# Altium PCB IPMC_MACP - 完成1.PcbDoc (part 1 of 2)
Units mil, origin at the board's own origin, x right, y up, seen from the top; angles counter-clockwise.
Board outline 3909.92 x 3909.91 mil, 2 copper layers (Top Layer, Bottom Layer); 134 components, 84 nets, 498 pads, 203 vias.
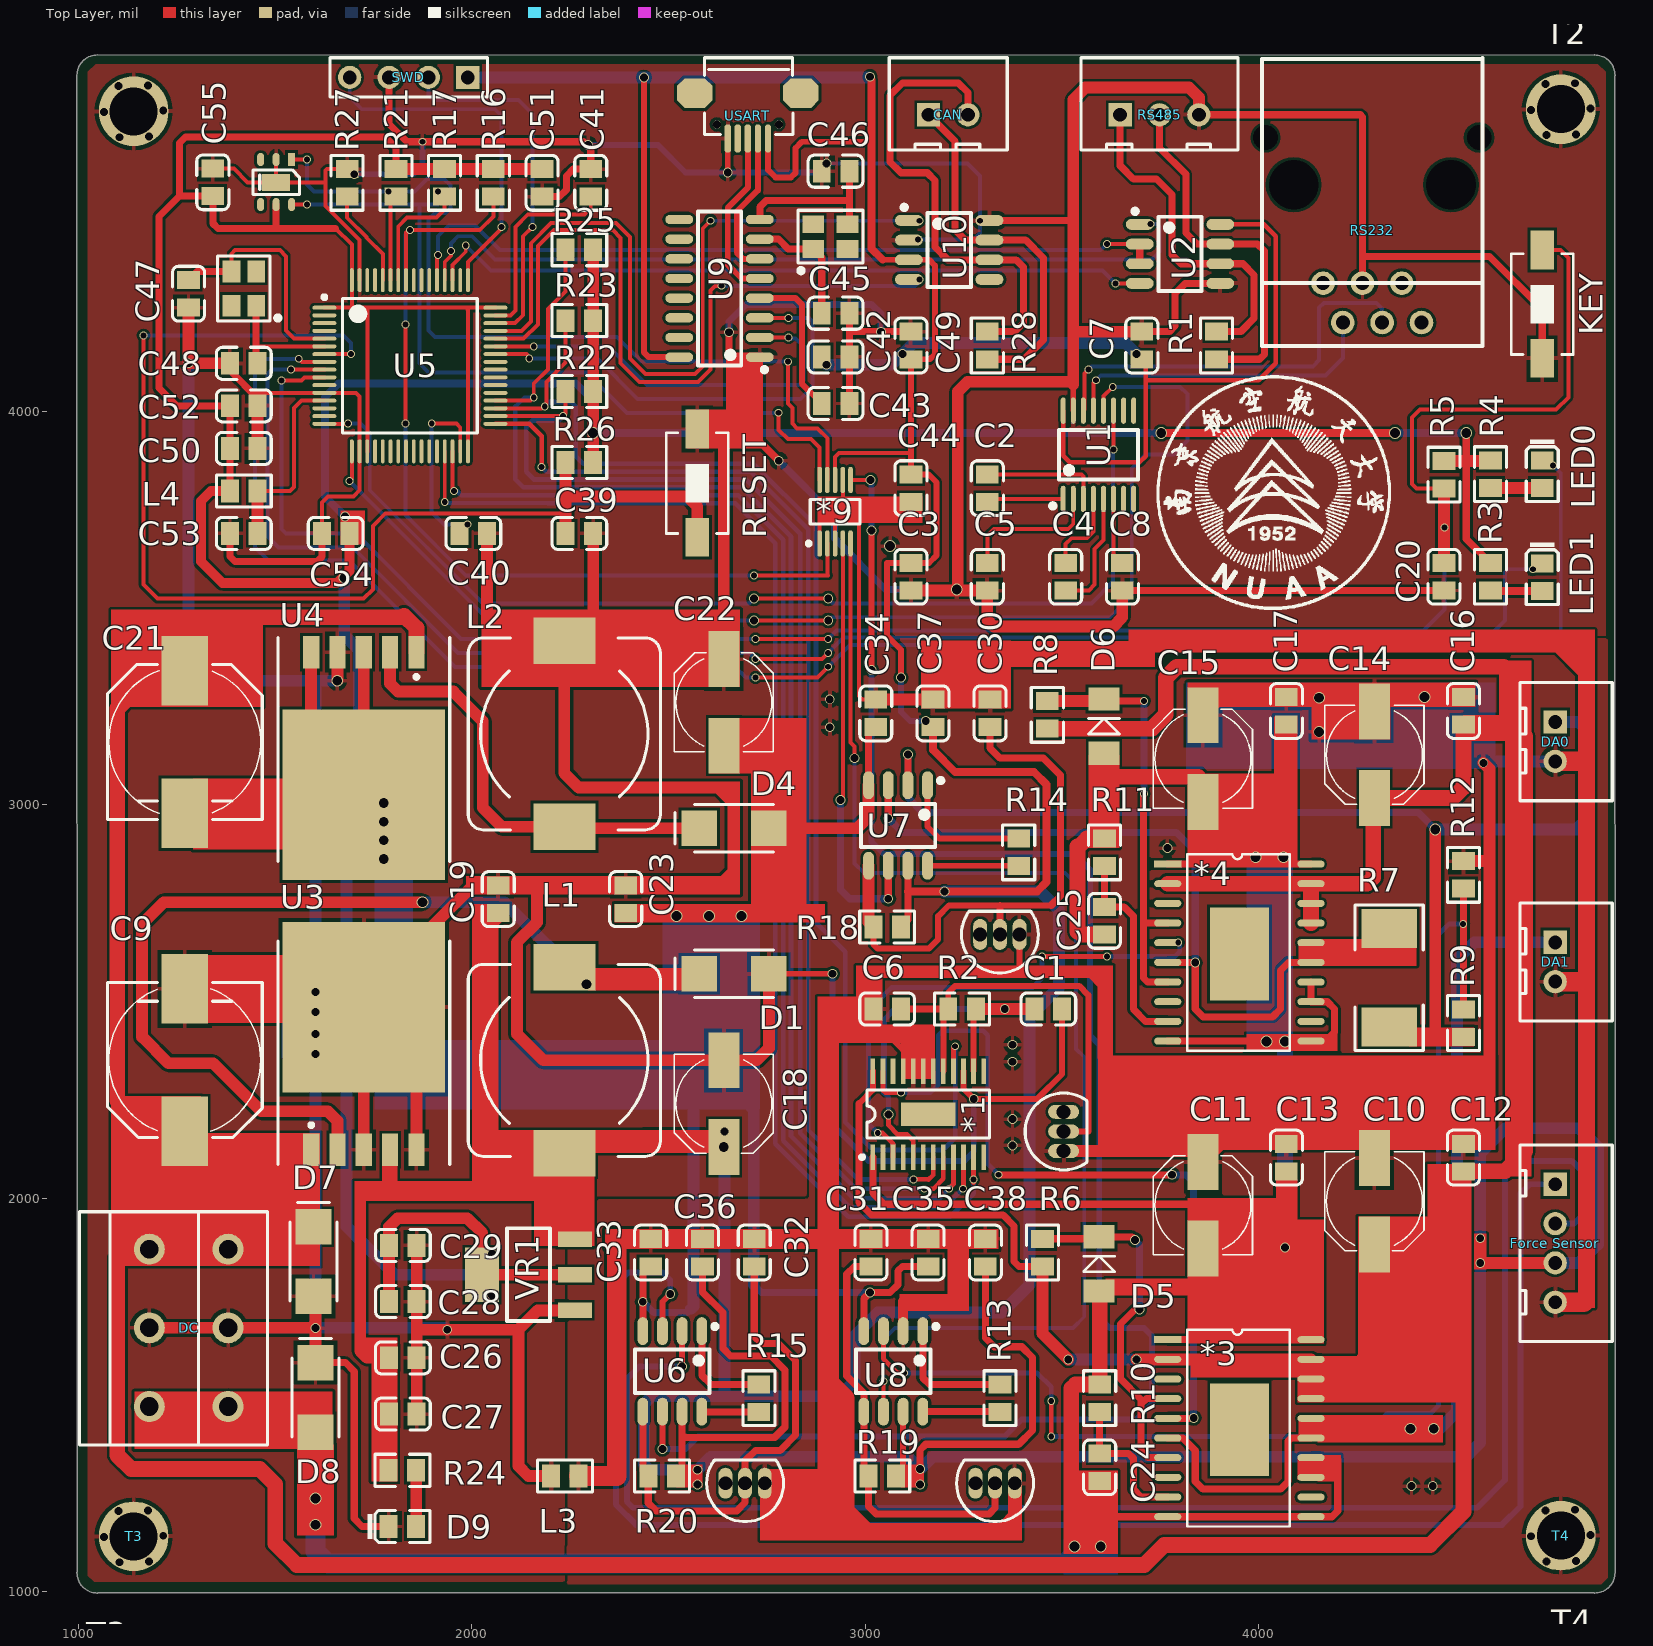
[diagram p0: Top Layer view]
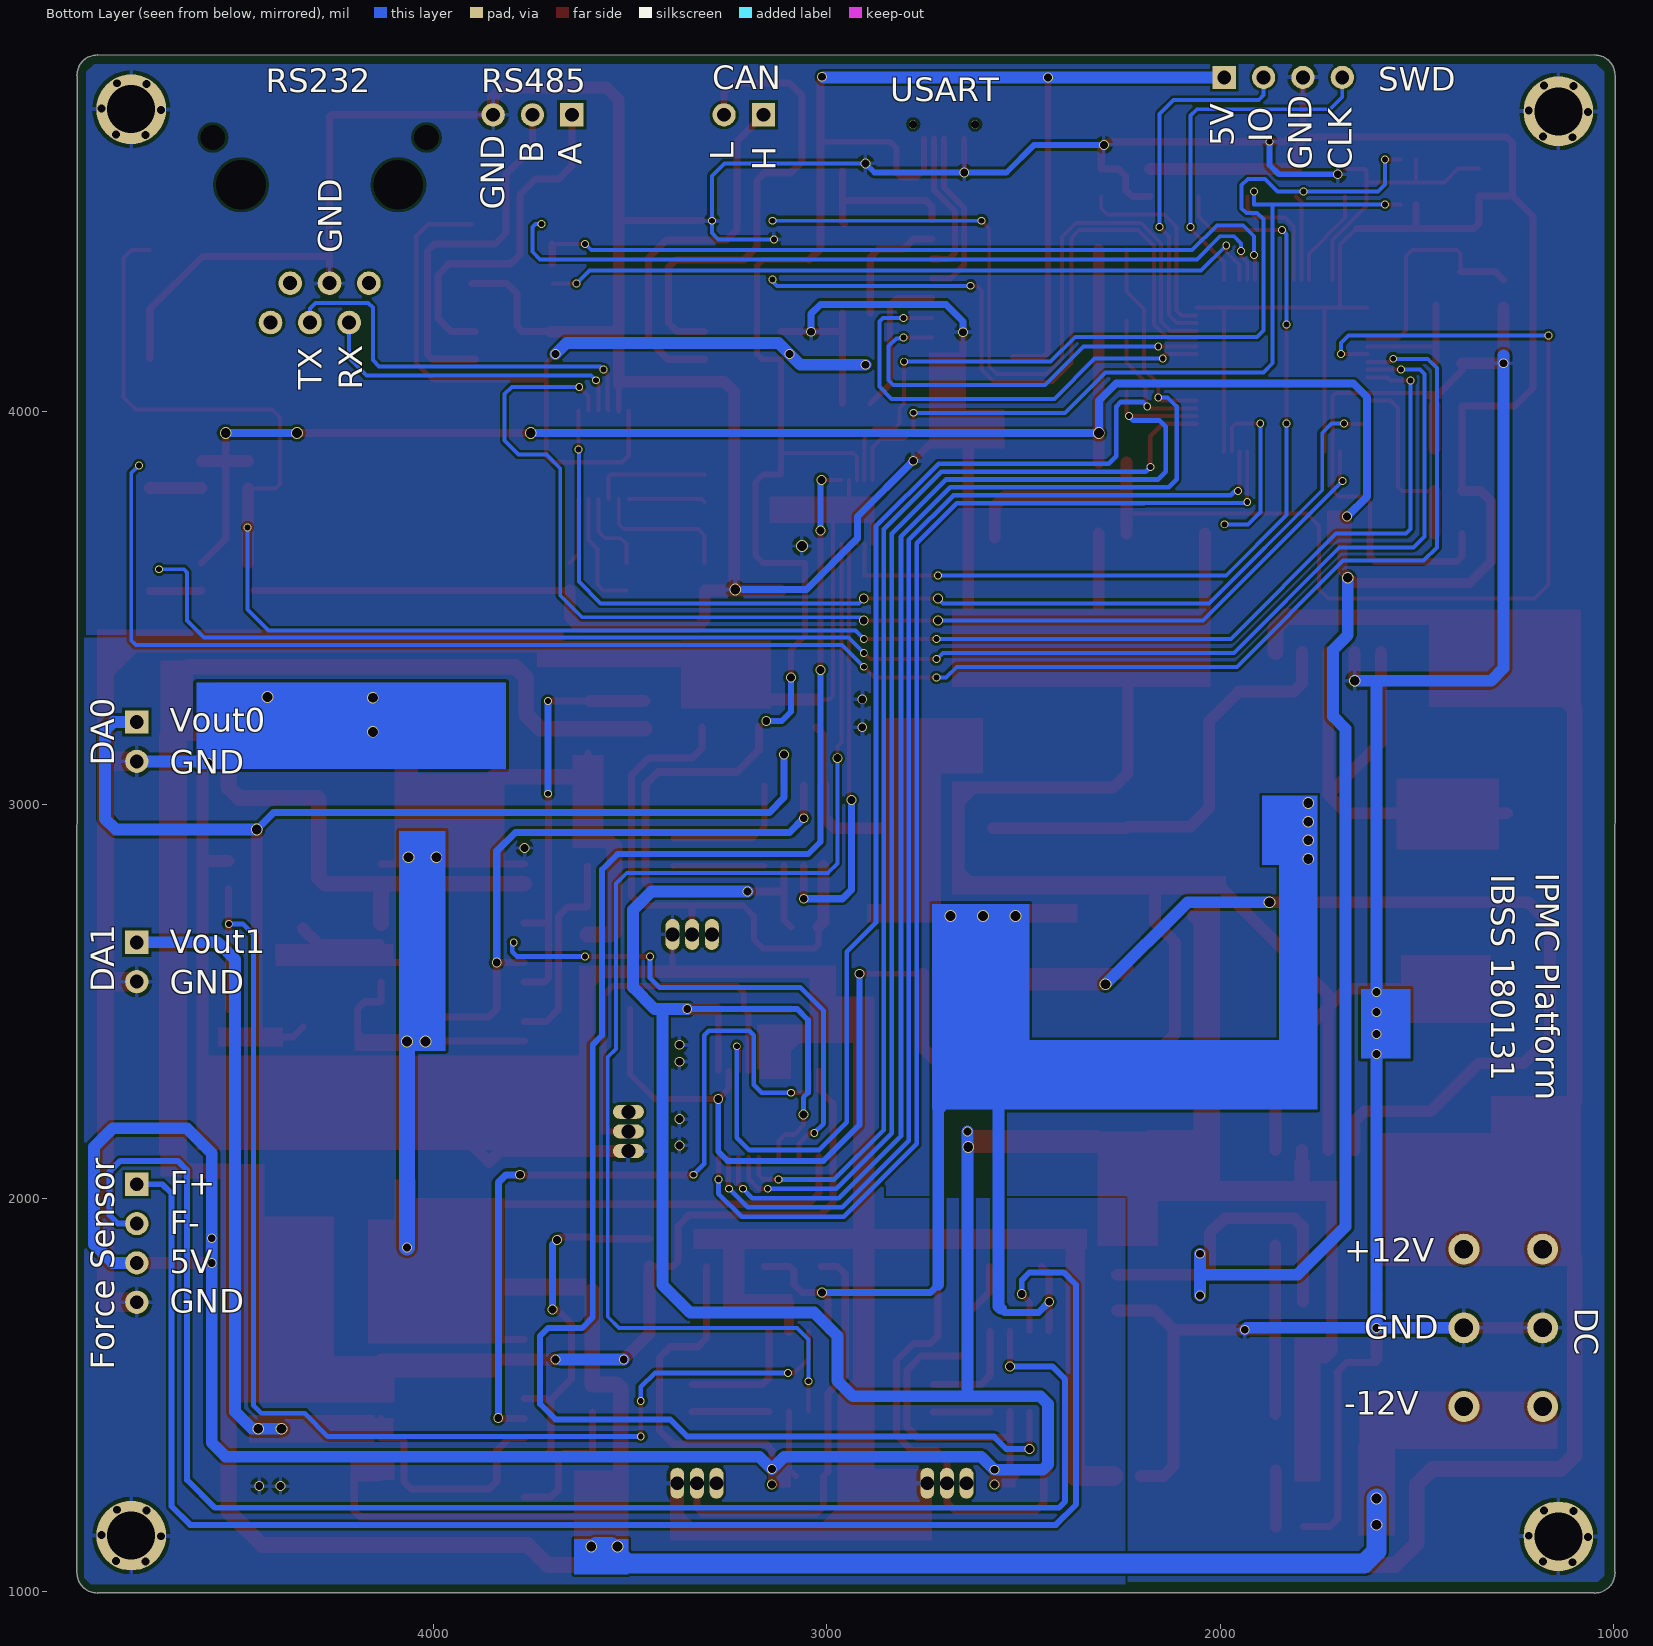
[diagram p1: Bottom Layer view, seen from below]
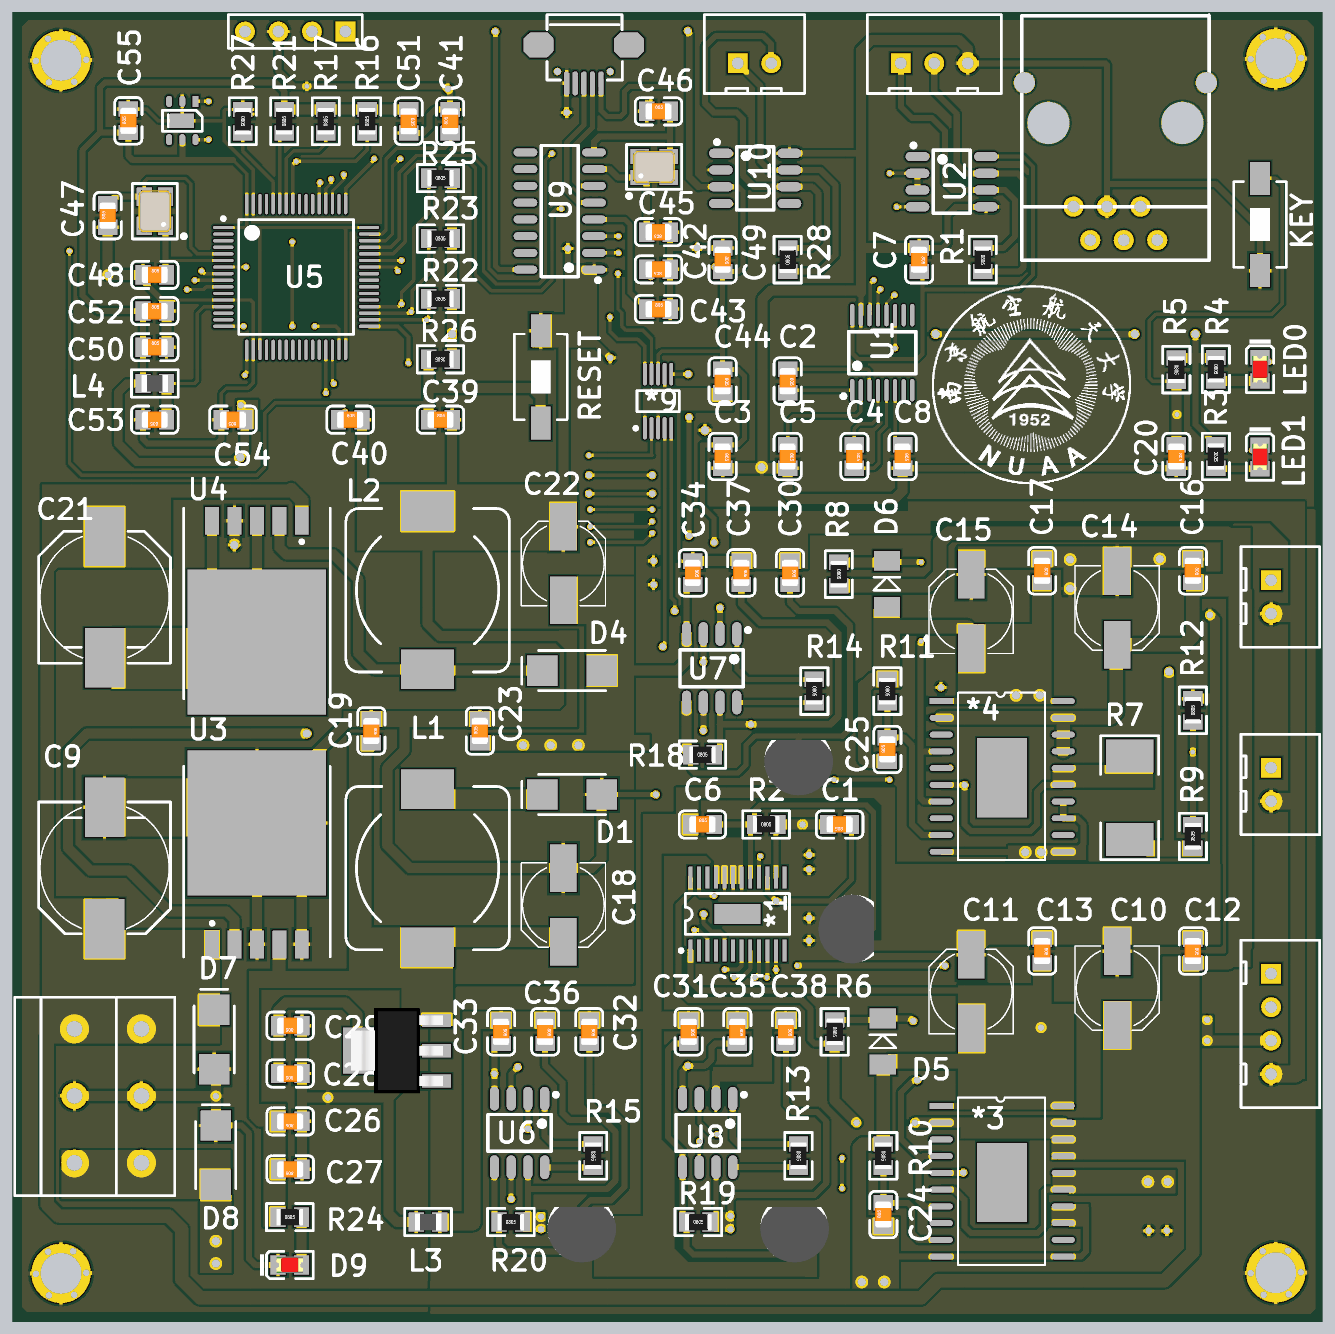
[diagram p3: 3D render of the assembled board from above, using the file's embedded part models]

## Layer stack, top to bottom
Top Solder: solder mask 0.4, Solder Resist, Dk 3.5
Top Layer: signal copper 1.4
Dielectric 1: dielectric 12.6, FR-4, Dk 4.8
Bottom Layer: signal copper 1.4
Bottom Solder: solder mask 0.4, Solder Resist, Dk 3.5

## Board outline
1040.51,996.32 ccw(c1042.13,1000) 1042.13,995.99 1043.65,995.99 ccw(c1047.64,1047.64) 1047.64,995.83 ccw(c1047.64,999.84) 1048.74,995.99 4852.84,995.98 ccw(c4853.94,999.84) 4853.94,995.83 ccw(c4853.94,1047.64) 4905.74,1047.45 ccw(c4901.73,1047.64) 4905.75,1047.64 ccw(c4901.73,1047.64) 4905.75,1047.64 4905.59,4852.84 ccw(c4901.73,4853.94) 4905.74,4853.94 ccw(c4853.94,4853.94) 4853.94,4905.74 ccw(c4853.94,4901.73) 4852.82,4905.59 1047.64,4905.74 ccw(c1047.64,4901.73) 1047.64,4905.74 ccw(c1047.64,4853.94) 995.83,4854.12 ccw(c999.84,4853.94) 995.83,4853.94 995.98,1048.74 ccw(c999.84,1047.64) 995.83,1047.64 ccw(c1047.64,1047.64)

## Design rules (kind name [scope] priority, off if disabled: settings)
Clearance [All] p1: gap=7
PolygonConnect [All] p1: connectstyle=Relief reliefconductorwidth=10 reliefentries=4 polygonreliefangle="90 Angle" airgapwidth=10
RoutingVias [All] p1: holewidth=28 width=50 viastyle="Through Hole" minholewidth=15 minwidth=15 maxholewidth=28 maxwidth=50
SolderMaskExpansion [All] p1: expansion=4
Width [All] p1: maxlimit=50 minlimit=8 preferedwidth=10
30 further rules are at their usual default settings.

## Classes and differential pairs
component class IPMC_MACP: *1 *3 *4 *9 C1 C2 C3 C4 C5 C6 C7 C8 C9 C10 C11 C12 C13 C14 C15 C16 C17 C18 C19 C20 C21 C22 C23 C24 C25 C26 C27 C28 C29 C30 C31 C32 C33 C34 C35 C36 C37 C38 C39 C40 C41 C42 C43 C44 C45 C46 C47 C48 C49 C50 C51 C52 C53 C54 C55 CAN D1 D4 D5 D6 D7 D8 D9 "Force Sensor" L1 L2 L3 L4 R1 R2 R3 R4 R5 R6 R7 R8 R9 R10 R11 R12 R13 R14 R15 R16 R17 R18 R19 R20 R21 R22 R23 R24 R25 R26 R27 R28 RESET RS232 RS485 SWD T2 T3 T4 U1 U2 U3 U4 U5 U6 U7 U8 U9 U10 USART VR1

## Components (designator, comment, footprint, x,y, rotation, side; value= is the part's Value field where it differs from the comment)
*1 "AD5722" TSSOP24P 3159.92,2213.2 r0 top
*2 "LM336" TO-92A 3504.08,2169.2 r0 top
*3 "OPA564AIDWP" HSOP20 3768.63,1639.91 r0 top
*4 "OPA564AIDWP" HSOP20 3768.63,2849 r0 top
*6 "LM336" TO-92A 3341.89,2670 r90 top
*7 "LM336" TO-92A 3329.76,1275 r90 top
*8 "LM336" TO-92A 2694.29,1275 r90 top
*9 "ADS1115" MSOP-UN10_N 2923.02,3744.57 r90 top
*10 "SHT20" DFN6 1463.5,4526.89 r90 top
C1 "100nF" 0805_C 3465.16,2480.51 r180 top
C2 "100nF" 0805_C 3310.04,3804.57 r270 top
C3 "100nF" 0805_C 3115.82,3579.37 r270 top
C4 "100nF" 0805_C 3509.25,3579.37 r270 top
C5 "100nF" 0805_C 3310.04,3579.37 r270 top
C6 "100nF" 0805_C 3055.39,2480.51 r0 top
C7 "100nF" 0805_C 3702.79,4167.17 r270 top
C8 "100nF" 0805_C 3653.23,3579.37 r270 top
C9 "470uF/35V" C-RB-S10 1270,2350.67 r90 top
C10 "47uF/35V" C-RB-S6 4294.03,1991.58 r90 top
C11 "47uF/35V" C-RB-S6 3858.13,1981.58 r270 top
C12 "100nF" 0805_C 4520.18,2102.82 r270 top
C13 "100nF" 0805_C 4070.18,2102.82 r270 top
C14 "47uF/35V" C-RB-S6 4294.03,3126.95 r90 top
C15 "47uF/35V" C-RB-S6 3858.13,3116.95 r270 top
C16 "100nF" 0805_C 4520.18,3238.2 r270 top
C17 "100nF" 0805_C 4070.18,3238.2 r270 top
C18 "220uF/16V" C-RB-S6 2640.12,2240 r90 top
C19 "100nF" 0805_C 2066.77,2759.84 r270 top
C20 "100nF" 0805_C 4470.71,3579.37 r270 top
C21 "470uF/35V" C-RB-S10 1270,3159.33 r270 top
C22 "220uF/16V" C-RB-S6 2640.12,3260 r270 top
C23 "100nF" 0805_C 2390.79,2759.84 r90 top
C24 "1nF" 0805_C 3595.69,1315.57 r90 top
C25 "1nF" 0805_C 3607.81,2704.67 r90 top
C26 "10uF" 0805_C 1824.35,1593.75 r180 top
C27 "100nF" 0805_C 1824.35,1450.84 r180 top
C28 "10uF" 0805_C 1824.35,1736.67 r180 top
C29 "100nF" 0805_C 1824.35,1879.59 r180 top
C30 "100nF" 0805_C 3317.13,3231.95 r270 top
C31 "100nF" 0805_C 3014.32,1861.34 r270 top
C32 "100nF" 0805_C 2717.54,1861.34 r270 top
C33 "100nF" 0805_C 2454.29,1861.34 r270 top
C34 "100nF" 0805_C 3026.45,3231.95 r270 top
C35 "100nF" 0805_C 3159.66,1861.34 r270 top
C36 "100nF" 0805_C 2585.92,1861.34 r270 top
C37 "100nF" 0805_C 3171.79,3231.95 r270 top
C38 "100nF" 0805_C 3305,1861.34 r270 top
C39 "100nF" 0805_C 2273.03,3689.37 r0 top
C40 "2.2uF" 0805_C 2003.54,3689.37 r0 top
C41 "2.2uF" 0805_C 2301.97,4580.63 r90 top
C42 "100nF" 0805_C 2924.2,4138.23 r180 top
C43 "100nF" 0805_C 2924.2,4019.68 r0 top
C44 "100nF" 0805_C 3115.82,3804.57 r270 top
C45 "22pF" 0805_C 2924.2,4249.28 r180 top
C46 "22pF" 0805_C 2924.2,4610.24 r0 top
C47 "22pF" 0805_C 1279.37,4298.83 r90 top
C48 "22pF" 0805_C 1420,4121.89 r0 top
C49 "100nF" 0805_C 3115.82,4167.17 r270 top
C50 "100nF" 0805_C 1420,3905.63 r0 top
C51 "100nF" 0805_C 2178.13,4580.63 r270 top
C52 "100nF" 0805_C 1420,4013.76 r0 top
C53 "100nF" 0805_C 1420,3689.37 r180 top
C54 "100nF" 0805_C 1653.54,3689.37 r180 top
C55 "100nF" 0805_C 1341.18,4581.89 r90 top
CAN "Header 2" HDR2X1_B1 3160.79,4753.64 r0 top (schematic designator CAN1)
D1 "1N5824" DIODE-SMA 2754.69,2570 r180 top
D4 "1N5824" DIODE-SMA 2754.69,2940 r180 top
D5 "1N4732" DIODE-1206 3594.37,1763.64 r90 top
D6 "1N4732" DIODE-1206 3606.5,3130.5 r90 top
D7 "1N4001" DIODE-SMA 1597.2,1749.88 r90 top
D8 "1N4001" DIODE-SMA 1602.2,1404.53 r90 top
D9 "红灯 0805" 0805_LED_S1 1823.15,1165 r0 top
DA0 "Header 2" HDR2X1_B1 4753.64,3210 r270 top (schematic designator DA1)
DA1 "Header 2" HDR2X1_B1 4753.64,2650 r270 top (schematic designator DA2)
DC "KF301-3P" KF301-3P 1180,1470 r90 top (schematic designator *5)
"Force Sensor" "Header 4" HDR4X1_B1 4753.64,2035 r270 top (schematic designator "Force Sensor1")
KEY "SW-PB" SW_PB2_A1 4720.71,4270 r0 top (schematic designator S1)
L1 "33uH" L-SMD-12 2234.69,2350 r270 top
L2 "33uH" L-SMD-12 2234.69,3180 r90 top
L3 "10uH/磁珠" 0805_L 2236.22,1293.31 r0 top
L4 "10uH" 0805_L 1420,3797.5 r180 top
LED0 "红灯 0805" 0805_LED_S1 4720.71,3840 r270 top (schematic designator D3)
LED1 "翠绿 0805" 0805_LED_S1 4720.71,3578.13 r270 top (schematic designator D2)
R1 "120Ω" 0805_R 3892.52,4167.17 r270 top
R2 "2.4KΩ" 0805_R 3245.74,2480.51 r0 top
R3 "1KΩ" 0805_R 4588.82,3579.37 r270 top
R4 "1KΩ" 0805_R 4588.82,3840 r270 top
R5 "10KΩ" 0805_R 4470.71,3838.82 r270 top
R6 "10KΩ" 0805_R 3450.34,1861.34 r270 top
R7 "10mR" 2512 4331.43,2559.98 r270 top
R8 "10KΩ" 0805_R 3462.47,3228.2 r270 top
R9 "10KΩ" 0805_R 4520.18,2444.67 r90 top
R10 "10KΩ" 0805_R 3595.69,1491.14 r270 top
R11 "10KΩ" 0805_R 3607.81,2878.78 r270 top
R12 "1KΩ" 0805_R 4520.18,2821.43 r90 top
R13 "0Ω" 0805_R 3342.31,1491.14 r270 top
R14 "200Ω" 0805_R 3389.87,2878.78 r270 top
R15 "1KΩ" 0805_R 2729.29,1491.14 r270 top
R16 "4.7KΩ" 0805_R 2054.28,4580.63 r90 top
R17 "4.7KΩ" 0805_R 1930.44,4580.63 r90 top
R18 "2.4KΩ" 0805_R 3055.39,2689 r0 top
R19 "2.4KΩ" 0805_R 3043.26,1293.31 r0 top
R20 "2.4KΩ" 0805_R 2483.23,1293.31 r0 top
R21 "4.7KΩ" 0805_R 1806.6,4580.63 r90 top
R22 "4.7KΩ" 0805_R 2273.03,4050 r0 top
R23 "4.7KΩ" 0805_R 2273.03,4230.31 r0 top
R24 "1KΩ" 0805_R 1823.15,1307.92 r0 top
R25 "4.7KΩ" 0805_R 2273.03,4410.63 r0 top
R26 "10KΩ" 0805_R 2273.03,3869.68 r180 top
R27 "10KΩ" 0805_R 1682.76,4580.63 r270 top
R28 "120Ω" 0805_R 3310.04,4167.17 r90 top
RESET "SW-PB" SW_PB2_A1 2572.52,3819.37 r180 top (schematic designator RESET1)
RS232 "RJ11" RJ6-RJ11 4288.67,4325.57 r270 top (schematic designator RS1)
RS485 "Header 3" HDR3X1_B1 3647.75,4753.64 r0 top (schematic designator RS2)
SWD "Header 4" HDR1X4 1989.25,4848.64 r180 top (schematic designator SWD1)
T1 "M3铜柱螺丝孔" 螺丝孔-3MM 1140,4762.52 r0 top
T2 "M3铜柱螺丝孔" 螺丝孔-3MM 4767.72,4767.72 r0 top
T3 "M3铜柱螺丝孔" 螺丝孔-3MM 1140,1140 r0 top
T4 "M3铜柱螺丝孔" 螺丝孔-3MM 4767.72,1141.73 r0 top
U1 "SP3232EEY-L/TR" TSSOP-16 3592.52,3889.37 r0 top
U2 "SP3485EN-L/TR" SOIC-8_150MIL 3799.9,4400 r270 top
U3 "LM2596S-5.0" TO-263-5 1725,2288.66 r0 top
U4 "LM2596S-5.0" TO-263-5 1725,3221.34 r180 top
U5 "STM32F405RGT6" STM-LQFP64_L 1842.2,4115.63 r0 top
U6 "AD620ARZ-REEL" SOIC-8_150MIL 2509.29,1559.32 r180 top
U7 "AD620ARZ-REEL" SOIC-8_150MIL 3083.14,2946.95 r180 top
U8 "AD620ARZ-REEL" SOIC-8_150MIL 3071.02,1559.32 r180 top
U9 "CH340G" SOIC-16_150MIL 2629.31,4312.44 r90 top
U10 "CAN/TJA1050T/CM" SOIC-8_150MIL 3212.93,4410 r270 top
USART "USB_M" USB_MICRO 2801.26,4758.64 r180 top (schematic designator USB_USART1)
VR1 "AMS1117-3.3" ? 2143.78,1805 r0 top
Y1 "12MHZ" SMD-3225_4P 2911.14,4444.07 r0 top
Y2 "25MHZ" SMD-3225_4P 1420,4311.89 r90 top
? "Comment" NUAA-15mm 3740.16,3496.06 r0 top

## Footprints (in the part's own frame and the unit in brackets; to place one, negate y for a bottom-side part, rotate by r counter-clockwise, add the part's x,y. Pads: shape width x height; smd on the part's side, far side on the other; paste and mask are expansions set on the pad)
0805_C [mm]
  rect 1.16x1.47 smd: 1(-0.89,0) 2(0.89,0)
  silkscreen extent -1.77,-1.04 1.77,1.04, body extent -1,-0.62 1,0.63, height 0.77
0805_L [mm]
  rect 1.16x1.47 smd: 1(-0.89,0) 2(0.89,0)
  silkscreen extent -1.77,-1.04 1.77,1.03, body extent -1.02,-0.64 1.03,0.64, height 0.6
0805_LED_S1 [mm]
  rect 1.16x1.47 smd: A(0.89,0) K(-0.89,0)
  silkscreen extent -2.24,-1.04 1.77,1.03, body extent -1.01,-0.62 1.01,0.62, height 1.1
0805_R [mm]
  rect 1.16x1.47 smd: 1(-0.89,0) 2(0.89,0)
  silkscreen extent -1.77,-1.04 1.77,1.03, body extent -1,-0.62 1,0.63, height 0.49
2512 [mm]
  rect 2.5x3.6 smd: 1(-3.175,0) 2(3.175,0)
  silkscreen extent -4.7,-2.2 4.7,2.2, body extent -3.18,-1.65 3.18,1.65, height 1.2
C-RB-S6 [mm] "贴片电解"
  rect 3.6x2 smd: 1(-2.794,0) 2(2.794,0)
  silkscreen extent -3.2,-3.2 3.2,3.2, body extent -3.15,-3.12 3.15,3.17, height 7.7
C-RB-S10 [mm] "贴片电解"
  rect 4.5x3 smd: 1(-4.6,0) 2(4.6,0)
  silkscreen extent -5,-5 5,5, body extent -4.97,-4.92 5.03,5.08, height 10
DFN6 [mm]
  rect 0.85x0.45 smd: 1(2.87,-1.981)
  rect 1.1x1.8 smd: 2(1.397,-0.965)
  oval 0.85x0.45 smd: 2(2.87,-0.981) 3(2.87,0.019) 4(-0.03,0.019) 5(-0.03,-0.981) 6(-0.03,-1.981)
  silkscreen extent 0.61,-2.48 2.2,0.52, body extent 0.19,-2.46 2.63,0.55, height 1
DIODE-1206 [mm] "玻璃封装二极管"
  rect 1.5x2 smd: 1(0,0) 2(3.5,0)
  silkscreen extent 1.25,-1 2.25,1
DIODE-SMA [mm] "贴片二极管"
  rect 2.3x2.3 smd: 1(0,0) 2(4.5,0)
  silkscreen extent -0.29,-1.52 6.06,1.52, body extent -0.67,-1.4 5.17,1.4, height 3
HDR1X4 [mm] "Connector; Header; 4 Position"
  rect 1.5x1.5 hole 0.9: 1(0,0)
  round 1.5 hole 0.9: 2(2.54,0) 3(5.08,0) 4(7.62,0)
  silkscreen extent -1.27,-1.27 8.89,1.27
HDR2X1_B1 [mm] "Connector; Header; 4 Position"
  rect 1.5x1.5 hole 0.9: 1(0,0)
  round 1.5 hole 0.9: 2(2.54,0)
  silkscreen extent -2.54,-2.29 5.08,3.68, body extent -2.41,-2.16 5.08,3.56, height 1.5
HDR3X1_B1 [mm] "Connector; Header; 3 Position"
  rect 1.5x1.5 hole 0.9: 1(0,0)
  round 1.5 hole 0.9: 2(2.54,0) 3(5.08,0)
  silkscreen extent -2.54,-2.29 7.62,3.68, body extent -2.54,-2.29 7.62,3.68, height 1.5
HDR4X1_B1 [mm] "Connector; Header; 4 Position"
  rect 1.5x1.5 hole 0.9: 1(0,0)
  round 1.5 hole 0.9: 2(2.54,0) 3(5.08,0) 4(7.62,0)
  silkscreen extent -2.54,-2.29 10.16,3.68, body extent -2.41,-2.16 10.03,3.56, height 1.5
HSOP20 [mm]
  rect 1.75x0.45 smd: 1(0,0)
  oval 1.75x0.45 smd: 2(0,-1.27) 3(0,-2.54) 4(0,-3.81) 5(0,-5.08) 6(0,-6.35) 7(0,-7.62) 8(0,-8.89) 9(0,-10.16) 10(0,-11.43) 11(9.254,-11.43) 12(9.254,-10.16) 13(9.254,-8.89) 14(9.254,-7.62) 15(9.254,-6.35) 16(9.254,-5.08) 17(9.254,-3.81) 18(9.254,-2.54) 19(9.254,-1.27) 20(9.254,0)
  rect 3.8x6 smd: ""(4.623,-5.817)
  silkscreen extent 1.27,-12.06 7.87,0.64, body extent 1.27,-12.06 7.87,0.64, height 0.25
KF301-3P [mm] "蓝色端子"
  round 2 hole 1.2: 1(0,0) 1(0,-5.08) 2(5.08,-5.08) 2(5.08,0) 3(10.16,-5.08) 3(10.16,0)
  silkscreen extent -2.49,-7.62 12.57,4.52
L-SMD-12 [mm] "贴片电感12*12"
  rect 3x4 smd: 1(-6,0) 2(6,0)
  silkscreen extent -6.2,-6.2 6.2,6.2, body extent -6.21,-6.23 6.21,6.18, height 2.5
MSOP-UN10_N [mm] "TSSOP"
  oval 1.7x0.3 smd: 1(-2.05,1) 2(-2.05,0.5) 3(-2.05,0) 4(-2.05,-0.5) 5(-2.05,-1) 6(2.05,-1) 7(2.05,-0.5) 8(2.05,0) 9(2.05,0.5) 10(2.05,1)
  silkscreen extent -2.17,-1.6 0.8,1.82, body extent -1.6,-1.6 1.6,1.6, height 1.1
NUAA-15mm [mil] "南航"
  silkscreen extent 1,1 595,595
RJ6-RJ11 [mil]
  round 60 hole 35.43: 1(100,125) 2(0,75) 3(100,25) 4(0,-25) 5(100,-75) 6(0,-125)
  round 60 hole 125.98: 7(-250,200) 8(-250,-200)
  round 60 hole 62.99: 9(-370,271.65) 10(-370,-271.65)
  silkscreen extent -572,-280 160,280, body extent -570,-280 160,280, height 512
SMD-3225_4P [mm]
  rect 1.4x1.15 smd: 1(-1.1,-0.8) 2(1.1,-0.8) 3(1.1,0.8) 4(-1.1,0.8)
  silkscreen extent -2.1,-2.35 2.1,1.7, body extent -1.6,-1.25 1.6,1.25, height 0.61
SOIC-8_150MIL [mm]
  oval 0.7x1.8 smd: 1(-1.905,-2.6) 2(-0.635,-2.6) 3(0.635,-2.6) 4(1.905,-2.6) 5(1.905,2.6) 6(0.635,2.6) 7(-0.635,2.6) 8(-1.905,2.6)
  silkscreen extent -2.9,-3.05 2.4,1.4
SOIC-16_150MIL [mm]
  oval 0.6x1.8 smd: 1(-4.445,-2.6) 2(-3.175,-2.6) 3(-1.905,-2.6) 4(-0.635,-2.6) 5(0.635,-2.6) 6(1.905,-2.6) 7(3.175,-2.6) 8(4.445,-2.6) 9(4.445,2.6) 10(3.175,2.6) 11(1.905,2.6) 12(0.635,2.6) 13(-0.635,2.6) 14(-1.905,2.6) 15(-3.175,2.6) 16(-4.445,2.6)
  silkscreen extent -5.4,-3.05 4.97,1.4
STM-LQFP64_L [mm] "Thin QFP, 64-Leads, Body 10x10mm, Pitch 0.5mm, IPC High Density"
  oval 1.55x0.25 smd: 1(-5.525,3.75) 2(-5.525,3.25) 3(-5.525,2.75) 4(-5.525,2.25) 5(-5.525,1.75) 6(-5.525,1.25) 7(-5.525,0.75) 8(-5.525,0.25) 9(-5.525,-0.25) 10(-5.525,-0.75) 11(-5.525,-1.25) 12(-5.525,-1.75) 13(-5.525,-2.25) 14(-5.525,-2.75) 15(-5.525,-3.25) 16(-5.525,-3.75) 33(5.525,-3.75) 34(5.525,-3.25) 35(5.525,-2.75) 36(5.525,-2.25) 37(5.525,-1.75) 38(5.525,-1.25) 39(5.525,-0.75) 40(5.525,-0.25) 41(5.525,0.25) 42(5.525,0.75) 43(5.525,1.25) 44(5.525,1.75) 45(5.525,2.25) 46(5.525,2.75) 47(5.525,3.25) 48(5.525,3.75)
  oval 0.25x1.55 smd: 17(-3.75,-5.525) 18(-3.25,-5.525) 19(-2.75,-5.525) 20(-2.25,-5.525) 21(-1.75,-5.525) 22(-1.25,-5.525) 23(-0.75,-5.525) 24(-0.25,-5.525) 25(0.25,-5.525) 26(0.75,-5.525) 27(1.25,-5.525) 28(1.75,-5.525) 29(2.25,-5.525) 30(2.75,-5.525) 31(3.25,-5.525) 32(3.75,-5.525) 49(3.75,5.525) 50(3.25,5.525) 51(2.75,5.525) 52(2.25,5.525) 53(1.75,5.525) 54(1.25,5.525) 55(0.75,5.525) 56(0.25,5.525) 57(-0.25,5.525) 58(-0.75,5.525) 59(-1.25,5.525) 60(-1.75,5.525) 61(-2.25,5.525) 62(-2.75,5.525) 63(-3.25,5.525) 64(-3.75,5.525)
  silkscreen extent -5.65,-4.35 4.35,4.55, body extent -5,-5 5,5, height 1.6
SW_PB2_A1 [mm]
  rect 1.5x2.5 smd: 1(0,3.556) 2(0,-3.444)
  silkscreen extent -2,-3.19 2,3.31, body extent -2.03,-3.17 2.03,3.3, height 1.2
TO-92A [mm]
  oval 2x0.9 hole 0.9: 1(0,-1.27) 2(0,0) 3(0,1.27)
  silkscreen extent -2.48,-2.48 1.5,2.48, body extent -2.6,-2.64 1.6,2.59, height 8
TO-263-5 [mm] "贴片LM2596"
  rect 1.05x2.1 smd: 1(-3.4,-4.225) 2(-1.7,-4.225) 3(0,-4.225) 4(1.7,-4.225) 5(3.4,-4.225)
  rect 10.5x11 smd: 6(0,4.987)
  silkscreen extent -5.55,-5.18 5.55,9.28, body extent -5.33,-4.7 5.33,10.29, height 3
TSSOP24P [mm] "Shrink Small Outline; 24 Leads; Body Width 4.4 mm; Pitch 0.65 mm"
  rect 0.3x1.65 smd: 1(-3.575,-2.775) 2(-2.925,-2.775) 3(-2.275,-2.775) 4(-1.625,-2.775) 5(-0.975,-2.775) 6(-0.325,-2.775) 7(0.325,-2.775) 8(0.975,-2.775) 9(1.625,-2.775) 10(2.275,-2.775) 11(2.925,-2.775) 12(3.575,-2.775) 13(3.575,2.775) 14(2.925,2.775) 15(2.275,2.775) 16(1.625,2.775) 17(0.975,2.775) 18(0.325,2.775) 19(-0.325,2.775) 20(-0.975,2.775) 21(-1.625,2.775) 22(-2.275,2.775) 23(-2.925,2.775) 24(-3.575,2.775)
  rect 3.5x1.5 smd: 25(0,0)
  silkscreen extent -4.4,-2.9 3.95,1.55
TSSOP-16 [mm]
  oval 0.32x1.7 smd: 1(-2.275,-2.85) 2(-1.625,-2.85) 3(-0.975,-2.85) 4(-0.325,-2.85) 5(0.325,-2.85) 6(0.975,-2.85) 7(1.625,-2.85) 8(2.275,-2.85) 9(2.275,2.85) 10(1.625,2.85) 11(0.975,2.85) 12(0.325,2.85) 13(-0.325,2.85) 14(-0.975,2.85) 15(-1.625,2.85) 16(-2.275,2.85)
  silkscreen extent -3.1,-3.45 2.55,1.6
USB_MICRO [mm] "USB方孔"
  oct 0.4x1.8 smd: 1(1.24,1.651) 2(1.89,1.651) 3(2.54,1.651) 4(3.19,1.651) 5(3.84,1.651)
  oct 2.286x1.9 smd: 6(5.969,-1.27) 7(-0.889,-1.27)
  round 0.54 hole 0.54: ""(0.54,0.753) ""(4.54,0.753)
  silkscreen extent -0.38,-3.56 5.33,1.4, body extent -0.43,-3.61 5.38,1.47, height 1.85
螺丝孔-3MM [mm]
  round 4.5 hole 3.1: 1(0,0)
? [mm]
  rect 2.2x1 smd: 1(3,-2.3) 2(3,0) 3(3,2.3)
  rect 2.2x3.5 smd: 2(-3,0)
  silkscreen extent -1.4,-3 1.4,3, body extent -3.49,-3.24 3.49,3.24, height 1.64

## Part data
*1: "双极性DAC"
*2 *6 *7 *8: "基准电压芯片2.5/5V"
*3 *4: "PAD on Bottom"
C1 C2 C3 C4 C5 C6 C7 C8 C12 C13 C16 C17 C19 C20 C23 C27 C29 C30 C31 C32 C33 C34 C35 C36 C37 C38 C39 C42 C43 C44 C49 C50 C51 C52 C53 C54 C55: library part "0805 100nF(104) 10% 50V", "贴片电容"
C9 C10 C11 C14 C15 C18 C21 C22: library part "Cap Pol", "极性电解电容"
C24 C25: library part "0805 1nF (102) 10% 50V", "贴片电容"
C26 C28: library part "0805 10uF (106) 10% 25V", "贴片电容"
C40 C41: library part "0805 2.2uF (225) 20% 50V", "贴片电容"
C45 C46 C47 C48: library part "0805 22pF (220) 5% 50V", "贴片电容"
CAN DA0 DA1 RS485: "接插件"
D1 D4 D7 D8: library part Diode, "二极管"
D5 D6: library part Diode-Z, "稳压二极管"
D9 LED0: library part "0805 红灯", "发光二极管"
DC: "蓝色端子"
"Force Sensor" SWD: "Header, 4-Pin"
KEY RESET: "微动开关"
L1 L2: library part Inductor, "电感"
L3 L4: library part "0805 10uH 10%", "贴片电感"
LED1: library part "0805 翠绿", "发光二极管"
R1 R28: library part "0805 120Ω (1200) 1%", "贴片电阻"
R2 R18 R19 R20: library part "0805 2.4KΩ (2401) 1%", "贴片电阻"
R3 R4 R15 R24: library part "0805 1KΩ (1001) 1%", "贴片电阻"
R5 R6 R8 R10 R11 R26 R27: library part "0805 10KΩ (1002) 1%", "贴片电阻"
R7: library part Res1, "贴片电阻"
R9 R12: library part "0805 20KΩ (2002) 1%", "贴片电阻"
R13: library part "0805 0Ω (0R0) 1%", "贴片电阻"
R14: library part "0805 200Ω (2000) 1%", "贴片电阻"
R16 R17 R21 R22 R23 R25: library part "0805 4.7KΩ (4701) 1%", "贴片电阻"
U1: "RS232"
U2: "RS-485/RS-422"
U3 U4: "5V稳压芯片"
U5: "ARM Cortex-M4 32-bit MCU+FPU, 210 DMIPS, 1024 kB Flash, 192 kB Internal RAM, 51 I/Os, 64-pin LQFP, -40 to 85 degC, Tray"
U6 U7 U8: "仪放"
U9: "USB"
U10: "CAN"
USART: "MicroUSB接口"
VR1: library part "SOT-223 AMS1117-3.3", "低压差线性稳压(LDO)"
Y1: library part "SMD-3225_4P  12MHZ 20PF 10PPM", "贴片晶振"
Y2: library part "SMD-3225_4P  25MHZ 12PF 10PPM", "贴片晶振"

## Via types
v1: diameter 20, hole 15, Top Layer to Bottom Layer, 76 vias
v2: diameter 25, hole 20, Top Layer to Bottom Layer, 71 vias
v3: diameter 30, hole 25, Top Layer to Bottom Layer, 32 vias
v4: diameter 20, hole 20, Top Layer to Bottom Layer, 24 vias

## Nets (pads, with @x,y where several pads share a name; then routed paths per layer and width w, separated by ;. In a path a pad name is that pad's centre, name@x,y a point inside that pad or via, vN(x,y) a via of type N, cw(c..) or ccw(c..) an arc to the next point about the centre after c; other vN are vias at no path point)
2.5V: *1.17 *2.2 C6.2 R2.1 | length 1107.3
  Top Layer w15: *1.17@3198.3,2322.45 3198.3,2468.11 R2.1@3210.7,2480.51 3210.7,2521.73 3228.35,2539.37 3543.31,2539.37 3566.84,2515.84 3566.84,2169.2 *2.2@3504.08,2169.2
  Top Layer w18: C6.2@3090.43,2480.51 R2.1@3210.7,2480.51
3.3V: *10.5 C28.2 C29.2 C50.1 C51.1 C52.1 C54.1 C55.1 L4.2 R3.1 R4.1 R5.1 R16.2 R17.2 R21.2 R22.2 R23.2 R25.2 R26.1 U5.1 U5.19 U5.32 U5.48 U5.64 VR1.2 | length 12075.7
  Top Layer w10: U5.1@1624.68,4263.27 1692.91,4263.27 ; 1653.54,4464.57 1694.57,4423.54 U5.64@1694.57,4333.15 1694.57,4264.92 1692.91,4263.27 ; U5.19@1733.94,3898.11 1733.94,4260.98 1736.22,4263.27 ; U5.32@1989.84,3898.11 1989.84,4257.68 1984.25,4263.27 ; U5.48@2059.72,4263.27 1984.25,4263.27 ; R4.1@4587.64,3873.86 R4.1@4588.82,3875.04 ; 1692.91,4263.27 1736.22,4263.27 ; 1736.22,4263.27 1984.25,4263.27
  Top Layer w18: L4.2@1384.96,3797.5 C50.1@1384.96,3905.63 C52.1@1384.96,4013.76 1250.02,4013.76 1204.72,4059.06 1204.72,4495.28 1256.3,4546.85 ; *10.5@1502.13,4525.72 1502.13,4466.69 1500,4464.57 ; 1653.54,4464.57 1500,4464.57 ; R21.2@1806.6,4615.67 1806.6,4669.78 1779.53,4696.85 1271.65,4696.85 1256.3,4681.5 1256.3,4546.85 ; v3(4527.56,3944.88) 4527.56,3873.86 4527.56,3675.67 R3.1@4588.82,3614.41 ; 1256.3,4546.85 C55.1@1341.18,4546.85 1341.18,4477.72 1354.33,4464.57 1500,4464.57
  Top Layer w20: v3(3751.97,3944.88) v3(4346.46,3944.88)
  Top Layer w25: L4.2@1384.96,3797.5 1336.87,3797.5 1311.02,3771.65 1311.02,3618.11 1366.14,3562.99 1657.48,3562.99 1688.58,3594.09 C54.1@1688.58,3689.37
  Top Layer w30: C28.2@1789.31,1736.67 C29.2@1789.31,1879.59 1789.31,1927.1 1811.02,1948.82 1988.19,1948.82 2025.67,1911.34 VR1.2@2025.67,1805 VR1.2@2261.89,1805 ; R21.2@1806.6,4615.67 R17.2@1930.44,4615.67 R16.2@2054.28,4615.67 C51.1@2178.13,4615.67 ; R26.1@2308.07,3869.68 v3(2308.07,3944.88) R22.2@2308.07,4050 R23.2@2308.07,4230.31 R25.2@2308.07,4410.63 ; R5.1@4470.71,3873.86 4527.56,3873.86 R4.1@4587.64,3873.86
  Bottom Layer w20: v2(1677.17,3732.28) 1625.98,3783.46 1625.98,4035.43 1661.42,4070.87 2263.78,4070.87 2308.07,4026.58 v3(2308.07,3944.88) v3(3751.97,3944.88) ; v3(4346.46,3944.88) v3(4527.56,3944.88)
  Bottom Layer w30: v3(1675.2,3576.77) 1675.2,3431.1 1712.6,3393.7 1712.6,3224.41 1681.1,3192.91 1681.1,1927.17 1803.15,1805.12 2051.18,1805.12 ; v2(2051.18,1751.97) 2051.18,1805.12 ; v2(2051.18,1858.27) 2051.18,1805.12
485-A: R1.1 RS485.1 U2.6 | length 895
  Top Layer w18: RS485.1@3647.75,4753.64 3647.75,4623.9 3681.1,4590.55 3740.16,4590.55 3779.53,4551.18 3779.53,4397.64 3802.17,4375 U2.6@3902.26,4375 3959.65,4375 3988.19,4346.46 3988.19,4236.22 3954.17,4202.2 R1.1@3892.52,4202.2
485-B: R1.2 RS485.2 U2.7 | length 936.5
  Top Layer w18: RS485.2@3747.75,4753.64 3747.75,4669.57 3814.96,4602.36 3814.96,4452.76 3842.72,4425 U2.7@3902.26,4425 3996.26,4425 4014.19,4407.07 4014.19,4144.11 4002.2,4132.13 R1.2@3892.52,4132.13
+5V: "Force Sensor.3" *1.5 *1.14 *9.8 C1.2 C3.1 C7.2 C18.1 C19.2 C26.2 C27.2 C36.2 C37.2 C38.2 C42.2 C44.1 C49.2 L1.2 R2.2 R18.2 R19.2 R20.2 R24.1 SWD.1 U1.16 U2.8 U3.4 U6.7 U7.7 U8.7 U9.16 U10.3 USART.1 VR1.3 | length 21157.8
  Top Layer w10: *9.8@2923.02,3825.28 2923.02,3883.65 2933.07,3893.7 3110.24,3893.7 3115.82,3888.12
  Top Layer w12: v2(3059.06,2212.6) 3059.06,2185.04 3082.68,2161.42 3106.3,2161.42 3121.53,2146.19 *1.5@3121.53,2103.95 ; U1.16@3502.95,4001.57 3502.95,3886.81 3519.69,3870.08 3696.85,3870.08 3712.6,3885.83 3712.6,4078.74 ; C7.2@3702.79,4132.13 3712.6,4122.31 3712.6,4078.74 ; U2.8@3902.26,4475 4013.19,4475 4043.31,4444.88 4043.31,4122.05 4000,4078.74 3712.6,4078.74
  Top Layer w15: v2@2440.94,4848.64 2437.01,4844.7 2437.01,4149.61 2449.17,4137.44 U9.16@2526.95,4137.44 ; USART.1@2752.44,4693.64 2752.44,4613.7 2771.65,4594.49 2811.02,4594.49 2822.83,4606.3 2822.83,4669.29 2838.58,4685.04 3015.75,4685.04 ; 3044.13,4385 U10.3@3110.57,4385 3162.24,4385 3177.17,4370.08 3177.17,4145.67 3163.62,4132.13 C49.2@3115.82,4132.13 3115.82,3888.12 C44.1@3115.82,3839.61 3160.39,3839.61 3181.1,3818.9 3181.1,3633.86 3161.65,3614.41 C3.1@3115.82,3614.41 3055.12,3614.41 3055.12,3429.13 3090.55,3393.7 v2(3090.55,3322.83) ; R19.2@3078.3,1293.31 3096.02,1311.02 U8.7@3096.02,1456.95 ; *1.14@3275.07,2322.45 3275.07,2474.8 R2.2@3280.78,2480.51
  Top Layer w18: R20.2@2518.27,1293.31 2534.29,1309.33 2534.29,1398.78 ; U6.7@2534.29,1456.95 2534.29,1398.78 ; C36.2@2585.92,1826.3 2585.92,1760.54 2637.8,1708.66 2637.8,1618.11 2657.48,1598.43 2759.84,1598.43 2795.28,1562.99 2795.28,1417.32 2769.69,1391.73 2541.34,1391.73 2534.29,1398.78 ; R18.2@3090.43,2689 3108.14,2706.72 3108.14,2779.53 U7.7@3108.14,2844.59 ; v2(3139.32,1311.02) 3139.32,1359.8 3153.54,1374.02 3389.76,1374.02 3425.2,1409.45 3425.2,1594.49 3397.64,1622.05 3326.77,1622.05 3305,1643.81 C38.2@3305,1826.3
  Top Layer w20: v2@3015.75,4842.52 3015.75,4685.04 3015.75,4413.39 3044.13,4385 ; 3108.14,2779.53 v2(3200.79,2779.53) 3437.01,2779.53 3460.63,2803.15 3460.63,3051.18 3429.13,3082.68 3228.35,3082.68 3171.79,3139.23 C37.2@3171.79,3196.91
  Top Layer w30: R24.1@1788.11,1307.92 1788.11,1592.56 C26.2@1789.31,1593.75 1733.02,1593.75 1715.8,1610.97 1715.8,2007.87 1783.46,2007.87 ; U3.4@1791.93,2122.32 1791.93,2016.34 1783.46,2007.87 ; C19.2@2070.71,2716.93 2019.68,2665.9 2019.68,2137.8 2043.7,2113.78 L1.2@2234.69,2113.78 ; VR1.3@2261.89,1895.55 2261.89,2086.57 L1.2@2234.69,2113.78 ; v3(2640.12,2130) 2250.91,2130 L1.2@2234.69,2113.78 ; R2.2@3280.78,2480.51 C1.2@3430.12,2480.51 ; v2(4562.99,1834.65) 4563.35,1835 4753.64,1835 ; 1783.46,2007.87 2204.72,2007.87 2234.69,2037.83 L1.2@2234.69,2113.78
  Bottom Layer w12: 3047.24,2267.72 3059.06,2255.91 v2(3059.06,2212.6)
  Bottom Layer w15: 3047.24,2267.72 3047.24,2452.76 3074.8,2480.32 v2(3354.33,2480.32) ; v2(3090.55,3322.83) 3090.55,3236.22 3114.17,3212.6 v2(3153.54,3212.6)
  Bottom Layer w30: SWD.1@1989.25,4848.64 v2@3007.87,4848.64 ; v2(2641.73,2169.29) 2641.73,1503.94 2649.61,1496.06 ; v2(2901.57,4118.11) 3066.93,4118.11 v2(3094.49,4145.67) 3122.05,4173.23 3661.42,4173.23 v2(3688.98,4145.67) ; v2@3200.79,2779.09 3445.32,2779.09 3492.13,2732.28 3492.13,2535.43 3437.01,2480.32 3417.32,2480.32 ; v2(3354.33,2480.32) 3417.32,2480.32 ; 4753.64,1835 4815.31,1835 4862.2,1881.89 4862.2,2129.92 4814.96,2177.17 4625.98,2177.17 4562.99,2114.17 4562.99,1377.95 4527.56,1342.52 3170.82,1342.52 v2(3139.32,1311.02) 3107.83,1342.52 2606.85,1342.52 v2(2573.66,1309.33) 2450.51,1309.33 2437.01,1322.83 2437.01,1476.38 2456.69,1496.06 2649.61,1496.06 ; 2649.61,1496.06 2933.07,1496.06 2972.44,1535.43 2972.44,1649.61 3031.5,1708.66 3346.46,1708.66 3417.32,1779.53 3417.32,2480.32
  other v2: 2573.66,1271.65 3139.32,1271.65 4562.99,1897.64 2437.01,4848.64 3011.81,4850.39
+12: *1.24 *3.2 *3.17 *3.18 *3.19 *4.2 *4.17 *4.18 *4.19 C9.1 C10.1 C12.2 C14.1 C16.2 C21.1 D7.2 DC.3 R6.2 R8.2 U3.1 U4.1 | length 14670.3
  Top Layer w15: 2984.25,2240.16 3019.17,2275.07 *1.24@3019.17,2322.45
  Top Layer w18: 2984.25,2240.16 2984.25,1988.19 3015.75,1956.69 3350.39,1956.69 3377.95,1929.13 3377.95,1838.58 3390.23,1826.3 R6.2@3450.34,1826.3
  Top Layer w30: R6.2@3450.34,1826.3 3450.34,1655.31 v2(3515.75,1589.91) ; v2(3689.62,1589.91) *3.2@3768.63,1589.91 *3.19@4132.96,1589.91
  Top Layer w40: 1270,3458.98 C21.1@1270,3340.43 1256.34,3326.77 1181.1,3326.77 1098.43,3244.09 1098.43,2248.03 1176.89,2169.57 C9.1@1270,2169.57 1317.24,2122.32 U3.1@1591.14,2122.32 1591.14,1933.11 D7.2@1597.2,1927.05 1540.16,1870 DC.3@1380,1870 DC.3@1180,1870 1121.97,1870 1098.43,1846.46 1098.43,1346.46 1133.86,1311.02 1460.63,1311.02 1500,1271.65 1500,1122.05 1555.12,1066.93 3708.66,1066.93 3759.84,1118.11 4435.44,1118.11 4520.18,1202.85 4520.18,1881.89 ; 1291.34,3476.38 1827.36,3476.38 ; 1827.36,3480.32 1858.86,3448.82 U4.1@1858.86,3387.68 ; R8.2@3462.47,3193.16 3728.35,3193.16 3763.78,3228.59 3763.78,3322.83 3791.34,3350.39 4622.05,3350.39 4647.24,3325.2 4647.24,3203.16 ; *4.2@3768.63,2799 *4.19@4132.96,2799 ; *4.17@4132.96,2699 *4.18@4132.96,2749 *4.19@4132.96,2799 ; 4267.07,1589.91 4294.03,1616.86 C10.1@4294.03,1881.58 4519.87,1881.58 4520.18,1881.89 ; C16.2@4520.18,3183.16 4520.18,3043.8 4493.33,3016.95 C14.1@4294.03,3016.95 4291.34,3014.27 4291.34,2814.96 4275.38,2799 *4.19@4132.96,2799 ; C16.2@4520.18,3203.16 4647.24,3203.16 ; 4520.18,1881.89 C12.2@4520.18,2067.78 4625.98,2067.78 4677.17,2118.96 4677.17,3173.23 4647.24,3203.16
  Bottom Layer w30: v2(3515.75,1589.91) v2@3677.81,1589.91
-5V: C21.2 C22.2 C23.1 C33.2 C34.2 C35.2 D4.1 U4.3 U4.5 U4.6 U6.4 U7.4 U8.4 | length 6228.1
  Top Layer w18: U6.4@2434.29,1661.68 v2(2434.29,1736.22) 2434.29,1806.3 C33.2@2454.29,1826.3 ; U8.4@2996.02,1661.68 2996.02,1744.05 v2(3011.81,1759.84) 3062.99,1759.84 3082.68,1779.53 3082.68,1814.96 3094.02,1826.3 C35.2@3159.66,1826.3 ; U7.4@3008.14,3049.32 3008.14,3178.61 C34.2@3026.45,3196.91
  Top Layer w30: C21.2@1270,2978.23 1678.23,2978.23 U4.6@1725,3025 ; U4.5@1591.14,3387.68 1591.14,3158.86 U4.6@1725,3025 ; U4.3@1725,3387.68 U4.6@1725,3025 ; C23.1@2394.72,2716.93 2724.8,2716.93 2754.69,2746.81 D4.1@2754.69,2940 ; C22.2@2640.12,3150 2735.83,3150 2754.69,3131.14 D4.1@2754.69,2940 ; U7.4@3008.14,3049.32 3008.14,2968.77 2979.37,2940 D4.1@2754.69,2940
  Bottom Layer w18: v2(2434.29,1736.22) 2461.85,1708.66 2547.24,1708.66 2557.09,1718.5 ; 2716.54,1779.53 2736.22,1759.84 v2(3011.81,1759.84)
  Bottom Layer w30: 1799.21,3007.87 1767.72,2976.38 1767.72,2295.28 1818.9,2244.09 2220.47,2244.09 ; 2220.87,2244.49 2220.47,2244.09 ; 2557.09,1718.5 2562.99,1724.41 2562.99,2244.09 ; 2716.54,1779.53 2716.54,2224.41 2696.85,2244.09 2562.99,2244.09 ; 2220.47,2244.09 2562.99,2244.09
  other v3: 2519.68,2716.93 2602.36,2716.93 2685.04,2716.93 1775.59,2862.2 1775.59,2909.45 1775.59,2956.69 1775.59,3003.94
-12: *1.1 *3.1 *3.10 *3.11 *3.13 *3.14 *3.20 *4.1 *4.10 *4.11 *4.13 *4.14 *4.20 C11.2 C13.2 C15.2 C17.2 C24.1 C25.1 D5.1 D6.1 D8.1 DC.1 R10.1 R11.1 | length 9477.3
  Top Layer w18: *1.1@3019.17,2103.95 3019.17,2012.33 3047.24,1984.25 3850.39,1984.25 3858.13,1976.51 C11.2@3858.13,1871.58 ; 3595.69,1200.79 3606.57,1189.91 *3.10@3768.63,1189.91 *3.11@4132.96,1189.91 4185.97,1189.91 4200.79,1204.72 4200.79,1334.65 ; D5.1@3595.69,1762.33 D5.1@3594.37,1763.64 3854.33,1763.64 3858.13,1759.84 ; D6.1@3606.5,3130.5 3606.5,3070.87 3606.5,2915.13 R11.1@3607.81,2913.82 ; *3.1@3768.63,1639.91 3858.27,1639.91 ; *4.10@3768.63,2399 *4.11@4132.96,2399 4170.65,2399 4192.91,2421.26 4192.91,2480.32 4174.23,2499 *4.13@4132.96,2499 *4.14@4132.96,2549 ; *4.1@3768.63,2849 3858.27,2849 ; v2(4066.93,1874.02) 3860.57,1874.02 C11.2@3858.13,1871.58 ; v2(4066.93,1874.02) 4070.18,1877.27 4070.18,1881.87 C13.2@4070.18,2067.78 ; C17.2@4070.18,3203.16 4070.18,3066.24 4010.89,3006.95 C15.2@3858.13,3006.95 3858.13,2849.13 3858.27,2849 ; *3.14@4132.96,1339.91 *3.13@4132.96,1289.91 4186.47,1289.91 ; *3.20@4132.96,1639.91 3858.27,1639.91 ; *4.20@4132.96,2849 3858.27,2849 ; 3858.13,1759.84 C11.2@3858.13,1871.58 ; 3858.13,1759.84 3858.13,1640.04 3858.27,1639.91
  Top Layer w30: DC.1@1180,1470 DC.1@1380,1470 1536.73,1470 D8.1@1602.2,1404.53 v3@1602.2,1236.22 ; 3595.69,1200.79 C24.1@3595.69,1280.54 ; v2(4066.93,1874.02) ccw(c4059.08,1881.87) v2@4070.18,1881.87
  Top Layer w40: 3539.37,2677.17 3539.37,2893.7 ; 3543.31,2677.17 3550.84,2669.63 C25.1@3607.81,2669.63 ; 3543.31,2893.7 3563.43,2913.82 R11.1@3607.81,2913.82 ; C24.1@3595.69,1280.54 3542.3,1280.54 3523.62,1299.21 3523.62,1515.75 3534.06,1526.18 R10.1@3595.69,1526.18 D5.1@3595.69,1762.33 ; 3606.5,3070.87 C15.2@3846.46,3070.87
  Bottom Layer w40: 3500,1070.87 3547.24,1118.11 v3@3586.61,1118.11 ; v2(4066.93,1874.02) v3(4066.93,2397.64)
  Bottom Layer w50: v3(1602.36,1236.22) v3(1602.36,1169.29) 1602.36,1102.36 1633.86,1070.87 3500,1070.87
  other v3: 3531.5,1114.17 3598.43,1114.17 4019.68,2397.64 3992.13,2866.14 4062.99,2866.14
AD-Vout0: *9.5 U8.6 | length 3229.4
  Top Layer w10: *9.5@2962.39,3663.86 2962.39,3157.48 2972.44,3147.43 v2(2972.44,3118.11) ; U8.6@3046.02,1456.95 v1(3046.02,1534.21)
  Bottom Layer w10: v2(2972.44,3118.11) 2972.44,2850.39 2996.06,2826.77 3507.87,2826.77 3535.43,2799.21 3535.43,2379.28 3556.45,2358.27 3556.45,1698.18 3527.56,1669.29 3074.8,1669.29 3046.02,1640.51 v1(3046.02,1534.21)
CANH: CAN.1 R28.1 U10.7 | length 946.4
  Top Layer w18: CAN.1@3160.79,4753.64 3228.35,4686.08 3228.35,4460.63 3253.98,4435 U10.7@3315.29,4435 3407.52,4435 3452.76,4389.76 3452.76,4181.1 3403.78,4132.13 R28.1@3310.04,4132.13
CANL: CAN.2 R28.2 U10.6 | length 1237.9
  Top Layer w18: CAN.2@3260.79,4753.64 3260.79,4810.08 3236.22,4834.65 3094.49,4834.65 3062.99,4803.15 3062.99,4633.86 3090.55,4606.3 3157.48,4606.3 3177.17,4586.61 3177.17,4417.32 3209.49,4385 U10.6@3315.29,4385 3382.72,4385 3401.57,4366.14 3401.57,4224.41 3379.37,4202.2 R28.2@3310.04,4202.2
CANRX: U5.44 U10.4 | length 1884.4
  Top Layer w10: U5.44@2059.72,4184.53 2131.24,4184.53 2167.61,4220.89 2167.61,4419.57 2208.38,4460.35 2358.55,4460.35 2377.95,4440.94 2377.95,4122.05 2425.2,4074.8 2574.8,4074.8 2606.3,4106.3 2606.3,4307.09 2618.11,4318.9 v1(2633.86,4318.9)
  Bottom Layer w10: v1(2633.86,4318.9) 3125.98,4318.9 v1@3141.73,4334.65
  other v1: 3137.8,4334.65
CANTX: U5.45 U10.1 | length 2014.7
  Top Layer w10: U5.45@2059.72,4204.21 2125.47,4204.21 2149.61,4228.35 2149.61,4427.03 2200.92,4478.35 2366.01,4478.35 2401.57,4442.78 2401.57,4133.86 2440.94,4094.49 2566.93,4094.49 2586.61,4114.17 2586.61,4464.57 v1(2606.3,4484.25)
  Bottom Layer w10: v1(2606.3,4484.25) v1(3137.8,4484.25)
"CH340 D+": U9.5 USART.3 | length 438.4
  Top Layer w15: USART.3@2701.26,4693.64 2701.26,4568.43 2650.23,4517.4 2650.23,4372.25 2685.04,4337.44 U9.5@2731.68,4337.44
"CH340 D-": U9.6 USART.2 | length 377.6
  Top Layer w15: U9.6@2712.6,4387.44 2688.98,4387.44 2673.23,4403.19 2673.23,4507.87 2726.85,4561.5 USART.2@2726.85,4693.64
  Top Layer w18: U9.6@2712.6,4387.44 U9.6@2731.68,4387.44
Current0: *9.4 U7.6 | length 1097.1
  Top Layer w10: v2(2937.01,3011.81) 2942.7,3017.5 *9.4@2942.7,3663.86
  Top Layer w18: v2(3058.14,2760.75) U7.6@3058.14,2844.59
  Bottom Layer w18: v2(2937.01,3011.81) 2937.01,2783.46 2959.72,2760.75 v2(3058.14,2760.75)
DA0: *1.3 *4.5 | length 1314.4
  Top Layer w12: v1(3031.5,2165.35) 3043.31,2165.35 3070.35,2138.31 *1.3@3070.35,2103.95 ; v1(3448.82,2614.17) v1(3614.17,2614.17)
  Bottom Layer w12: v1(3031.5,2165.35) 3007.87,2188.98 3007.87,2476.38 3066.93,2535.43 3425.2,2535.43 3448.82,2559.06 v1(3448.82,2614.17) ; v1(3614.17,2614.17) 3787.4,2614.17 3799.21,2625.98 v1@3799.21,2649.61
  other v1: 3795.28,2649.61
DA1: *1.23 *3.5 | length 1996
  Top Layer w12: *1.23@3044.76,2322.45 3044.76,2274.14 3051.18,2267.72 v1(3090.55,2267.72)
  Top Layer w18: v1(3338.58,2059.06) v2(3779.53,2059.06) ; *3.5@3768.63,1439.91 3833.61,1439.91 v2(3834.65,1440.94)
  Bottom Layer w12: v1(3090.55,2267.72) 3165.35,2267.72 3185.04,2287.4 3185.04,2413.39 3196.85,2425.2 3299.21,2425.2 3311.02,2413.39 3311.02,2086.61 v1(3338.58,2059.06)
  Bottom Layer w18: v2(3779.53,2059.06) 3814.96,2059.06 3834.65,2039.37 v2(3834.65,1440.94)
DA_CLR#: *1.11 U5.29 | length 3245.2
  Top Layer w10: v1(1930.79,3769.37) U5.29@1930.79,3898.11
  Top Layer w12: v1@3275.07,2038.85 v1(3275.07,2046.73) *1.11@3275.07,2103.95
  Bottom Layer w10: v1(1930.79,3769.37) 1933.7,3766.46 2192.91,3766.46
  Bottom Layer w12: 2192.91,3766.46 2669.1,3766.46 2771.02,3664.53 2771.02,2137.7 2956.6,1952.13 3215.91,1952.13 3275.07,2011.29 v1(3275.07,2046.73)
DA_LDAC#: *1.10 U5.30 | length 3143.8
  Top Layer w10: v1@1950.47,3796.93 U5.30@1950.47,3898.11
  Top Layer w12: v1(3248.03,2023.62) 3249.48,2025.07 *1.10@3249.48,2103.95
  Bottom Layer w12: v1(1954.41,3796.93) 1961.97,3796.93 1972.44,3786.46 2677.39,3786.46 2791.02,3672.82 2791.02,2145.98 2960.63,1976.38 3200.79,1976.38 v1(3248.03,2023.62)
DA_SCLK: *1.8 R22.1 U5.34 | length 3230.7
  Top Layer w10: U5.34@2059.72,3987.68 v1(2231.77,3987.68) 2237.99,3993.9 R22.1@2237.99,4050
  Top Layer w12: v1(3149.61,2023.62) 3173.23,2023.62 3198.3,2048.69 *1.8@3198.3,2103.95
  Bottom Layer w12: v1(2231.77,3987.68) 2220.47,3976.38 2153.54,3976.38 2137.8,3960.63 2137.8,3846.46 2157.8,3826.46 2697.17,3826.46 2834.65,3688.98 2834.65,2164.63 2976.03,2023.24 3149.23,2023.24 v1(3149.61,2023.62)
DA_SDIN: *1.9 R25.1 U5.36 | length 3597.8
  Top Layer w10: U5.36@2059.72,4027.05 2149.09,4027.05 v1(2156.97,4034.92) 2156.97,4070.35 2192.91,4106.3 2192.91,4259.84 2237.99,4304.92 R25.1@2237.99,4410.63
  Top Layer w12: v1(3212.6,2023.62) 3223.89,2034.91 *1.9@3223.89,2103.95
  Bottom Layer w10: 2110.24,4011.81 2133.35,4034.92 v1(2156.97,4034.92)
  Bottom Layer w12: 2110.24,4011.81 2110.24,3826.77 2130.55,3806.46 2685.67,3806.46 2811.02,3681.1 2811.02,2157.48 2968.88,1999.62 3188.6,1999.62 v1(3212.6,2023.62)
DA_SDO: *1.16 R23.1 U5.35 | length 3429.2
  Top Layer w10: U5.35@2059.72,4007.36 2176.65,4007.36 2188.98,4019.68 2188.98,4074.8 2237.99,4123.82 R23.1@2237.99,4230.31
  Top Layer w12: *1.16@3223.89,2322.45 3223.89,2381.37 v1(3228.35,2385.83)
  Bottom Layer w12: v1(2185.04,4011.81) 2196.85,4023.62 2251.97,4023.62 2263.78,4011.81 2263.78,3885.83 2283.15,3866.46 2715.53,3866.46 2874.65,3707.34 2874.65,2700.16 2948.82,2625.98 2948.82,2192.91 3019.69,2122.05 3196.85,2122.05 3228.35,2153.54 v1(3228.35,2385.83)
DA_SYNC#: *1.7 U5.33 | length 2903.9
  Top Layer w12: U5.33@2059.72,3967.99 2146.18,3967.99 2177.17,3937.01 v1(2177.17,3858.27) v1@2177.17,3854.33 ; v1(3122.05,2047.24) 3122.43,2047.62 3159.55,2047.62 3159.93,2047.24 3161.42,2047.24 3172.71,2058.54 *1.7@3172.71,2103.95
  Bottom Layer w12: v1(2177.17,3858.27) 2188.98,3846.46 2708.66,3846.46 2854.65,3700.47 2854.65,2172.91 2980.32,2047.24 v1(3122.05,2047.24)